# EAGLE board controller (EAGLE 9.6.2)
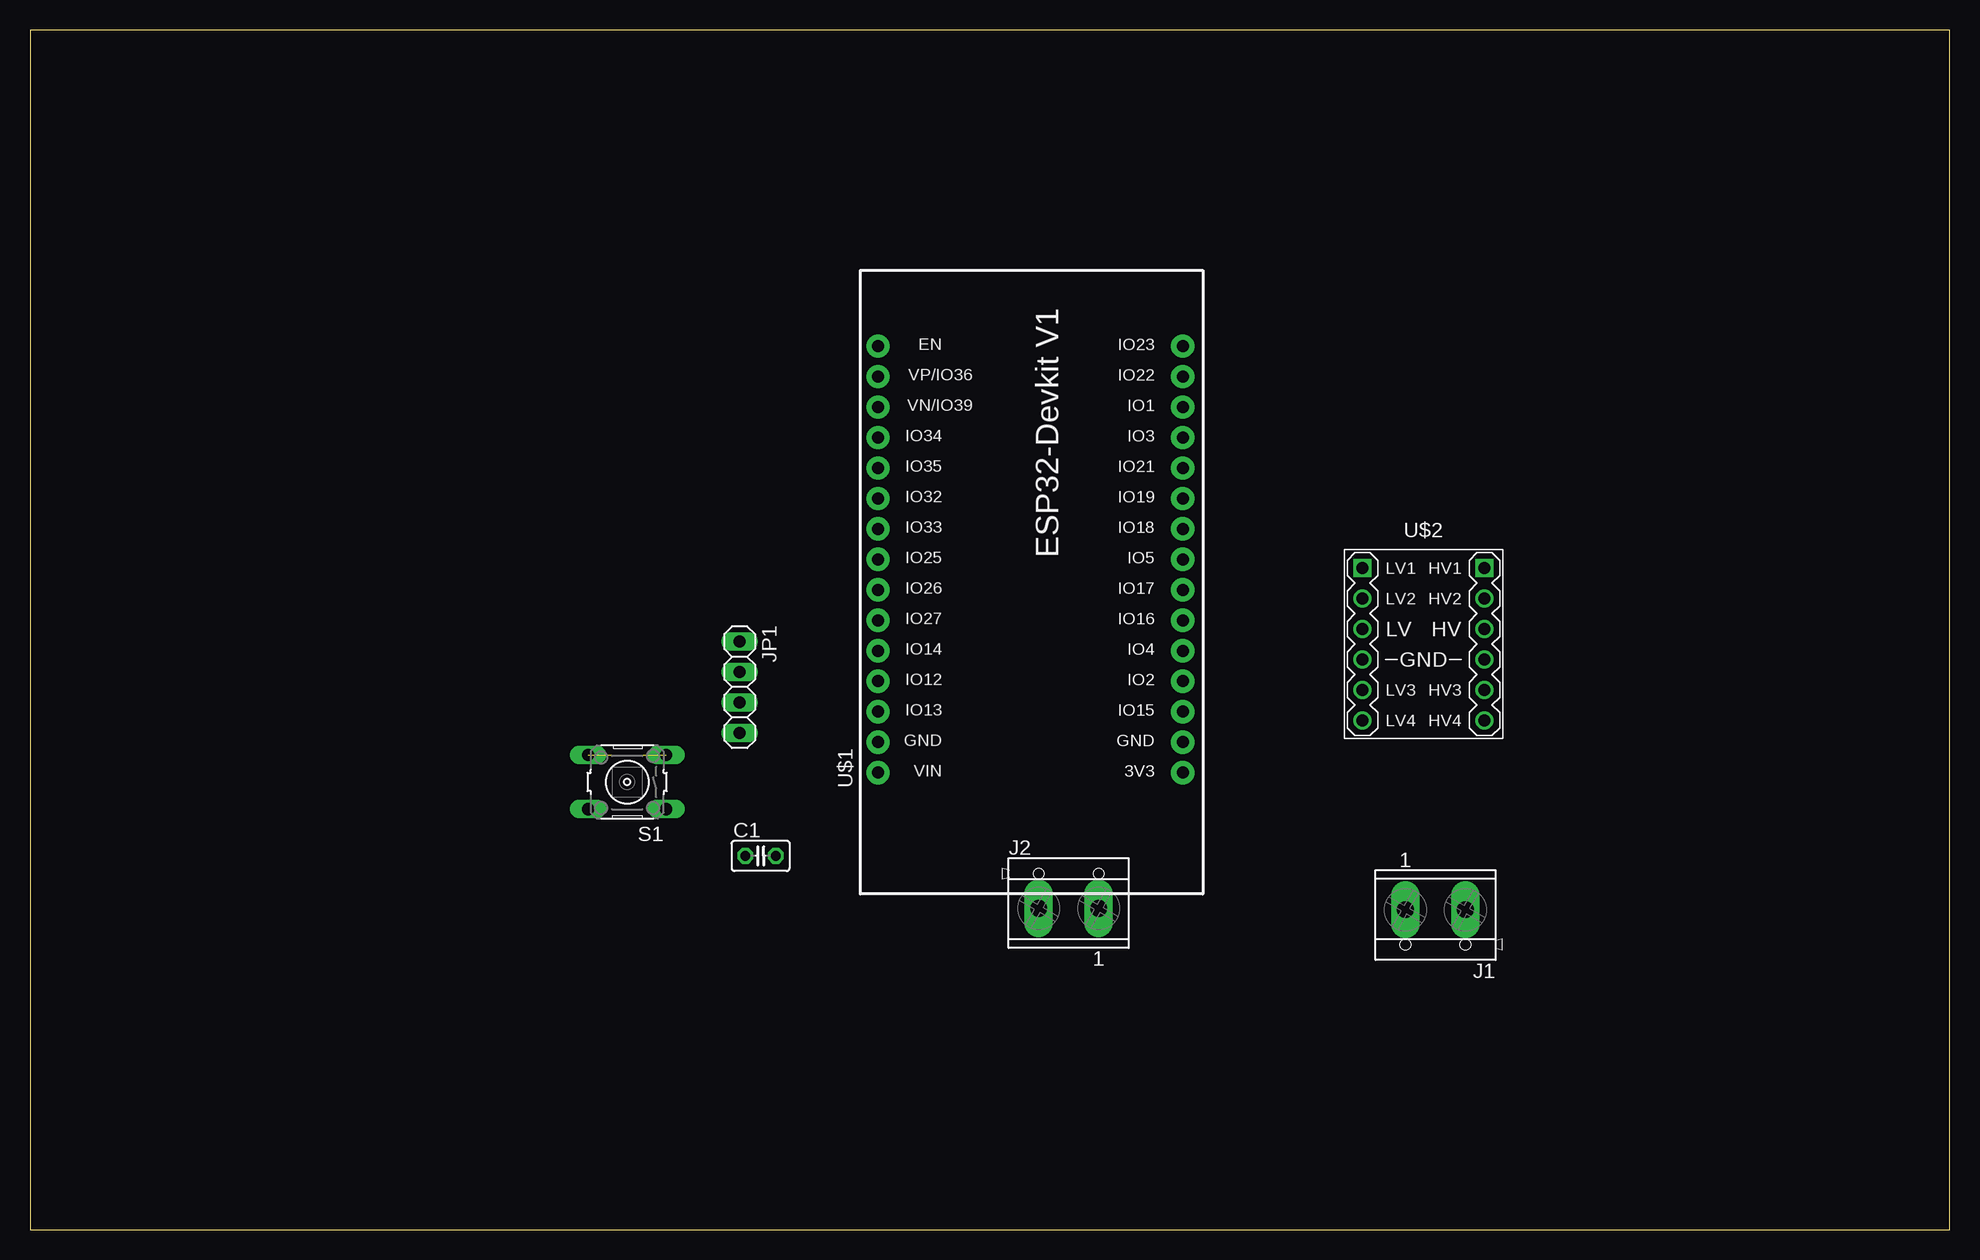
[diagram p0: board, top side]
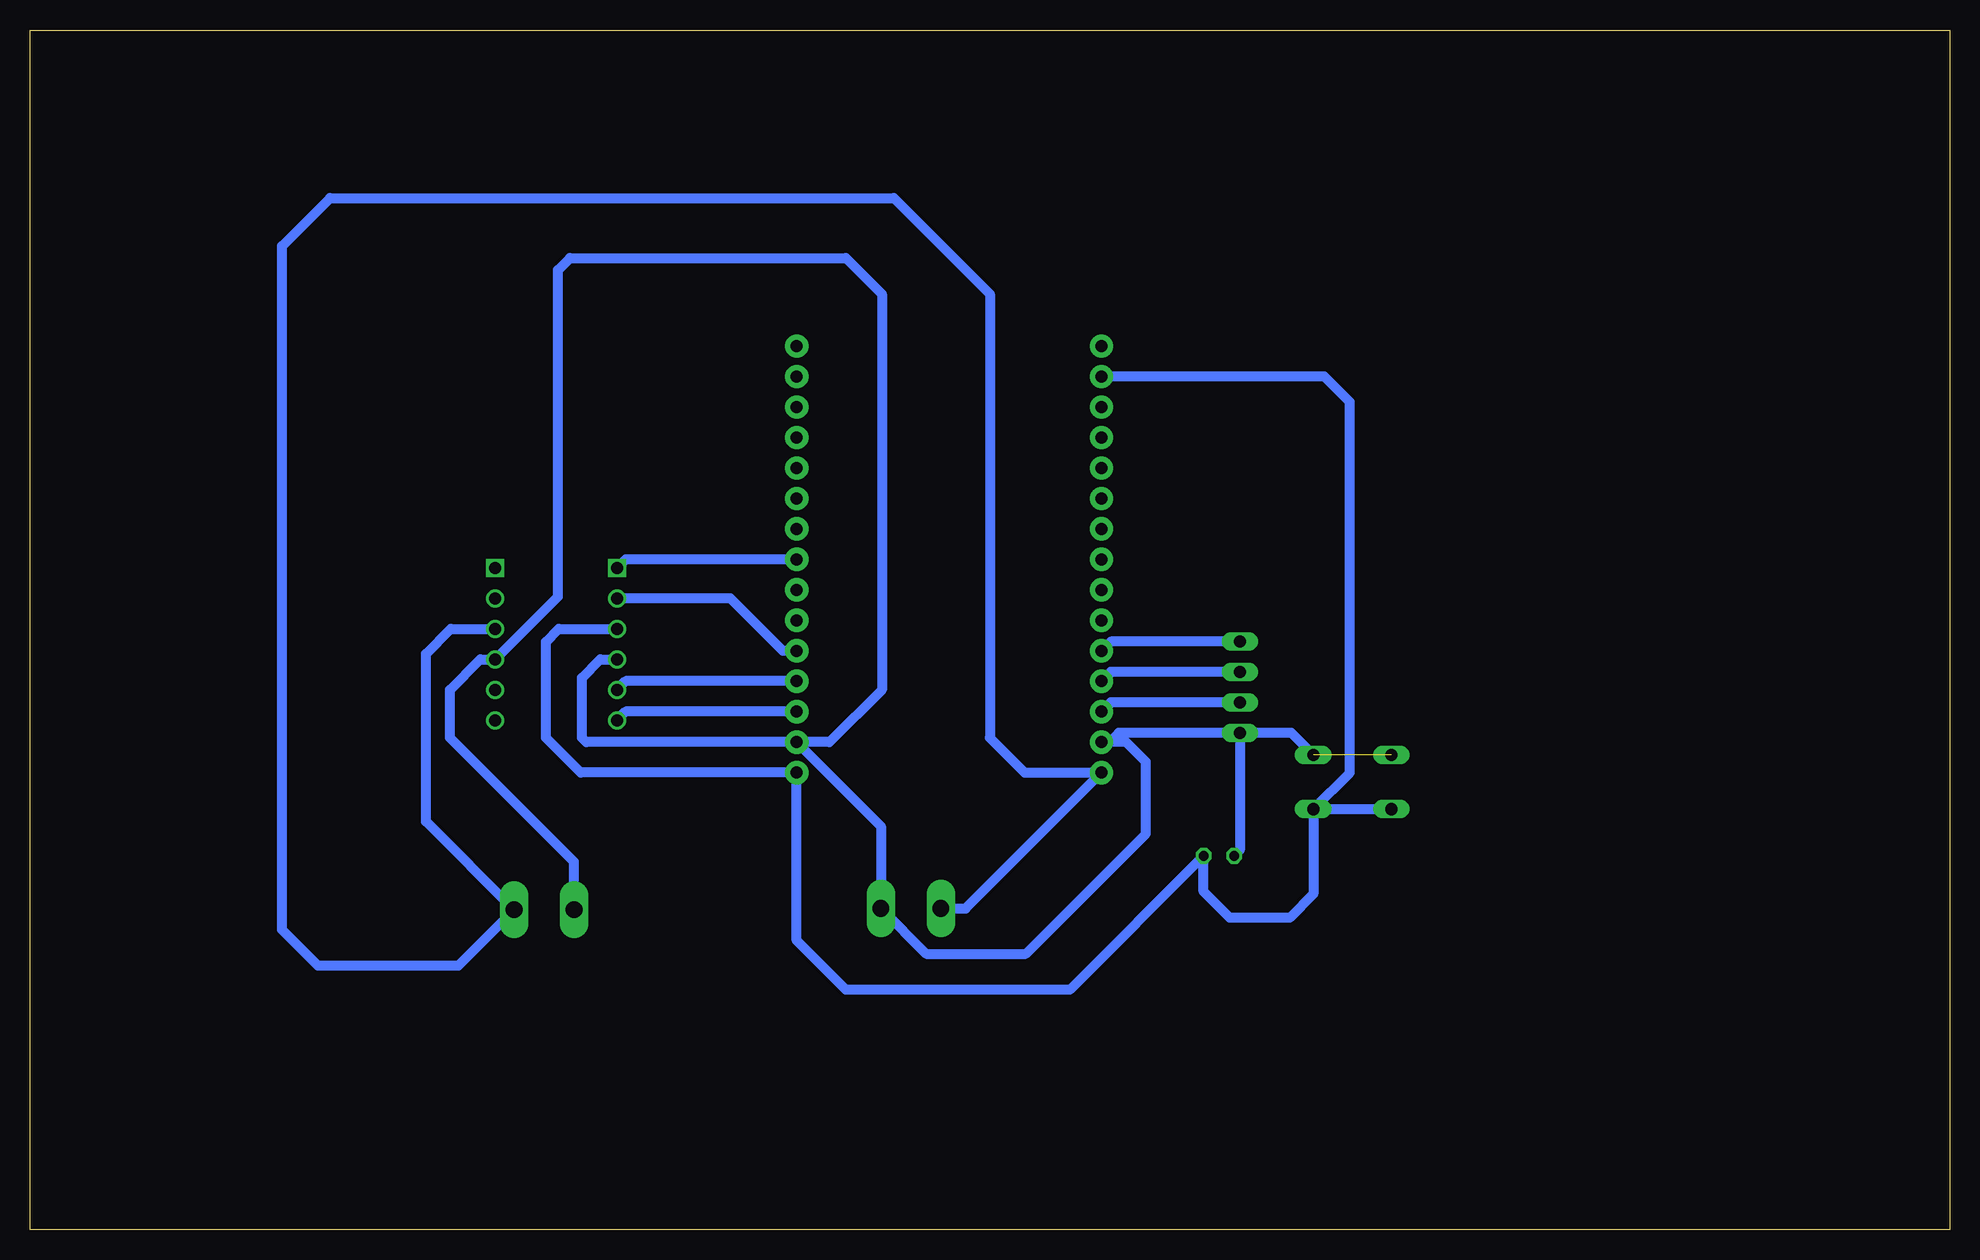
[diagram p1: board, bottom side, seen from below]

Size 160 x 100 mm. Coordinates in mm from the lower left corner, seen from the top.
Outline: 0,0 160,0 160,100 0,100 0,0
Copper layers (1*16): Top 0.035mm / dielectric 1.5mm / Bottom 0.035mm
Design rules "default": minimum track width 6mil, minimum drill 0.35mm, track to track 6mil, track to pad 6mil, pad to pad 6mil, via to via 6mil, smd to smd 6mil, copper to edge 40mil, drill to drill 6mil, minimum pad ring 10mil, minimum via ring 8mil, stop-mask expansion 4mil, vias tented up to drill 0mil, thermal gap 10mil

## Footprints (pad centres in the part's own frame; a part is rotated, then mirrored left to right if it is on the bottom)
C025-025X050 = drill 0.813 octagon: 1 -1.27,0; 2 1.27,0
TERMINAL_BLOCK_2P_5 = drill 1.4 pad 2.38 long: 1 2.5,-0.45; 2 -2.5,-0.45
1X04 = drill 1.016 long: 1 -3.81,0; 2 -1.27,0; 3 1.27,0; 4 3.81,0
B3F-10XX = drill 1.016 long: 1 -3.251,2.261; 2 3.251,2.261; 3 -3.251,-2.261; 4 3.251,-2.261
ESP32-DEVKITV1 = drill 1 pad 1.93: 3V3 -16.52,-12.27; D1 13.96,-12.27; D2 -8.9,-12.27; D3 11.42,-12.27; D4 -6.36,-12.27; D5 1.26,-12.27; D12 -8.9,13.135; D13 -11.44,13.135; D14 -6.36,13.135; D15 -11.44,-12.27; D16 -3.82,-12.27; D17 -1.28,-12.27; D18 3.8,-12.27; D19 6.34,-12.27; D21 8.88,-12.27; D22 16.5,-12.27; D23 19.04,-12.27; D25 1.26,13.135; D26 -1.28,13.135; D27 -3.82,13.135; D32 6.34,13.135; D33 3.8,13.135; D34 11.42,13.135; D35 8.88,13.135; D36 16.5,13.135; D39 13.96,13.135; EN 19.04,13.135; GND@1 -13.98,13.135; GND@2 -13.98,-12.27; VIN -16.52,13.135
LEVEL-SHIFTER-4CH = drill 1 square: J1.1 -5.08,6.35; J2.1 5.08,6.35 | drill 1: J1.2 -5.08,3.81; J1.3 -5.08,1.27; J1.4 -5.08,-1.27; J1.5 -5.08,-3.81; J1.6 -5.08,-6.35; J2.2 5.08,3.81; J2.3 5.08,1.27; J2.4 5.08,-1.27; J2.5 5.08,-3.81; J2.6 5.08,-6.35

## Placement (x,y rotation side)
C1  [C025-025X050]  60.9,31.15 0 top
J1  CON_TERMINAL_BLOCK_02-5MM  [TERMINAL_BLOCK_2P_5]  117.15,26.21 180 top
J2  CON_TERMINAL_BLOCK_02-5MM  [TERMINAL_BLOCK_2P_5]  86.58,27.22 0 top
JP1  [1X04]  59.15,45.21 270 top
S1  [B3F-10XX]  49.78,37.31 180 top
U$1  ESP32DEVKITV1  [ESP32-DEVKITV1]  83.82,54.61 90 top
U$2  LEVEL-SHIFTER-4CH  [LEVEL-SHIFTER-4CH]  116.15,48.8 0 top

## Library data of the parts
C1 = rcl; SPICEPREFIX: C
J1 J2 = tblok
JP1 = pinhead
S1 = switch-omron; MPN: B3F-1000; OC_FARNELL: 176432; OC_NEWARK: 36M3542
U$1 = esp32-devkitv1
U$2 = diy-model

## Nets
GND: C1.1 J1.1 J2.1 JP1.4 S1.3 S1.4 U$1.GND@1 U$1.GND@2 U$2.J1.4 U$2.J2.4
HV: J1.2 J2.2 U$1.VIN U$2.J2.3
LV: C1.2 S1.1 S1.2 U$1.3V3 U$1.D36 U$2.J1.3
LV1: U$1.D5 U$2.J1.1
LV2: U$1.D4 U$2.J1.2
LV3: U$1.D2 U$2.J1.5
LV4: U$1.D15 U$2.J1.6
OUT1: JP1.1 U$1.D14
OUT2: JP1.2 U$1.D12
OUT3: JP1.3 U$1.D13

## Tracks (layer width: path | path; a pad name or v marks a point on that pad's centre or on a via)
GND  (1 unrouted)
  Bottom 0.813: U$1.GND@2 89.08,33.62 J2.1 85.31,23 77,23 67,33 67,39 68.63,40.63 70,40.63 | U$1.GND@2 113.63,40.63 114,41 114,46 112.47,47.53 U$2.J1.4 | U$1.GND@2 93.37,40.63 89,45 89,78 92,81 115,81 116,80 116,52.76 U$2.J2.4 122.47,47.53 125,45 125,41 114.65,30.65 J1.1 | 70,40.63 U$1.GND@1 | S1.3 54.86,41.4 JP1.4 | JP1.4 59.15,31.63 C1.1 | JP1.4 69.23,41.4 70,40.63
HV
  Bottom 0.813: U$2.J2.3 124.93,50.07 127,48 127,34.01 J1.2 124.31,22 136,22 139,25 139,82 135,86 88,86 80,78 80,41 77.09,38.09 U$1.VIN 82,26.77 J2.2
LV
  Bottom 0.813: S1.1 53.03,27.97 55,26 60,26 62.17,28.17 C1.2 73.32,20 92,20 96.09,24.09 U$1.3V3 114.09,38.09 117,41 117,49 115.93,50.07 U$2.J1.3 | S1.1 S1.2 | S1.1 50,38.08 50,69 52.11,71.11 U$1.D36
LV1
  Bottom 0.813: U$1.D5 110.35,55.87 U$2.J1.1
LV2
  Bottom 0.813: U$1.D4 97.25,48.25 101.61,52.61 U$2.J1.2
LV3
  Bottom 0.813: U$1.D2 110.35,45.71 U$2.J1.5
LV4
  Bottom 0.813: U$1.D15 110.35,43.17 U$2.J1.6
OUT1
  Bottom 0.813: JP1.1 69.92,49.02 U$1.D14
OUT2
  Bottom 0.813: JP1.2 69.92,46.48 U$1.D12
OUT3
  Bottom 0.813: JP1.3 69.92,43.94 U$1.D13